# Allegro board PMOD2BNC_V1_0_1.brd
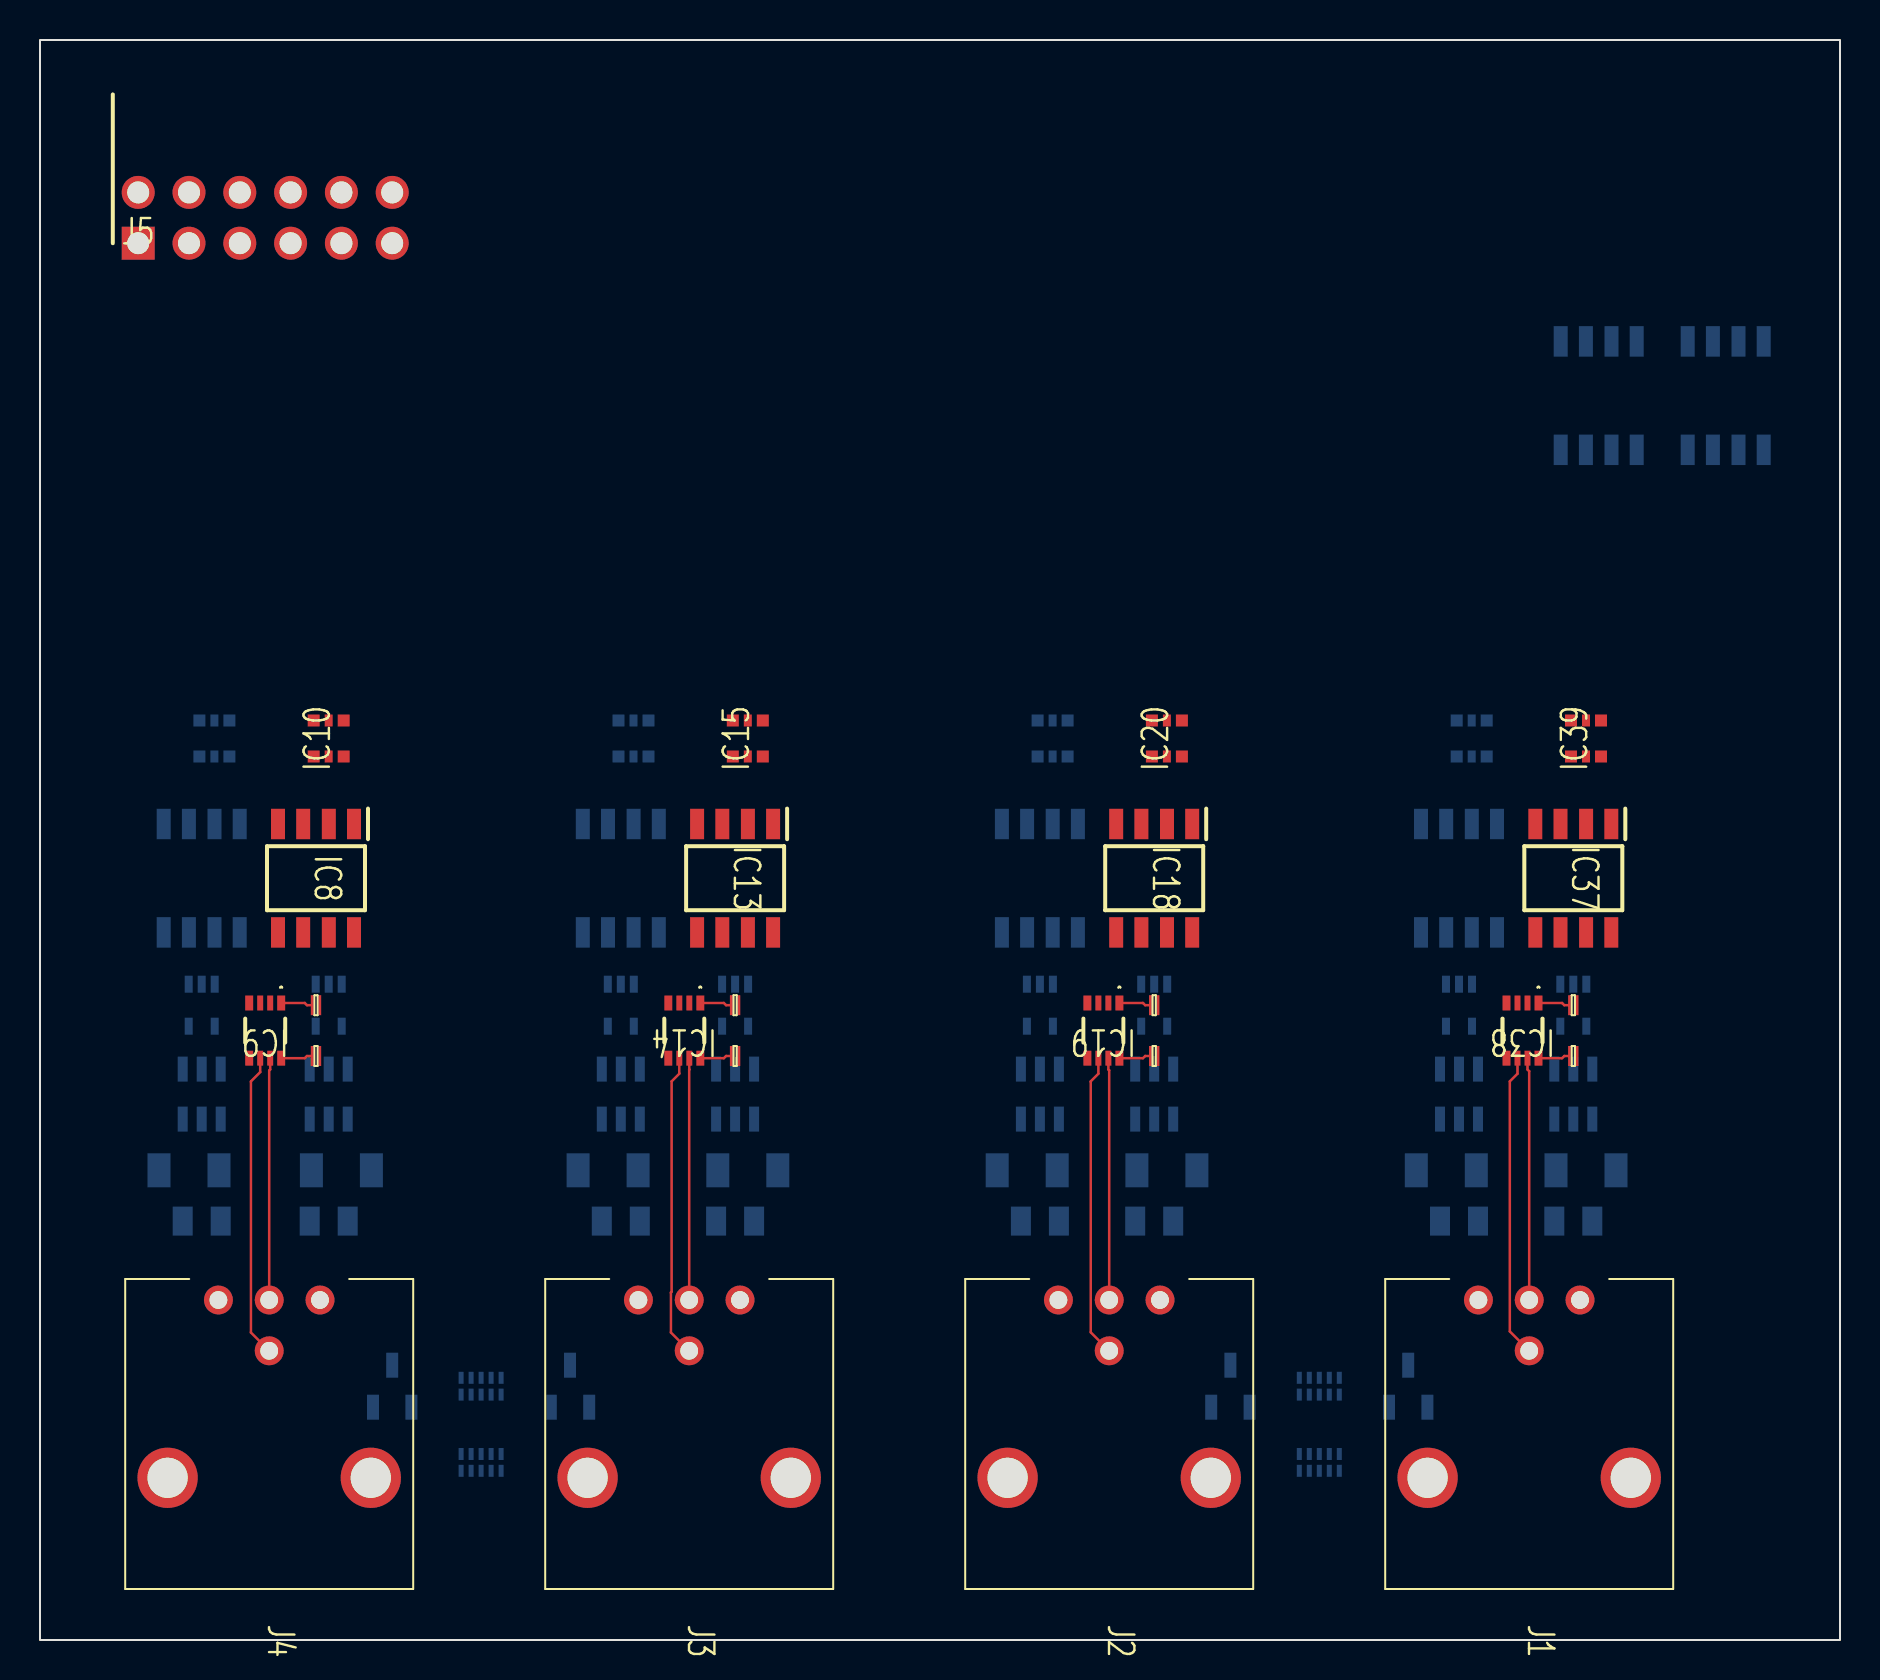
[diagram p0: board, top side]
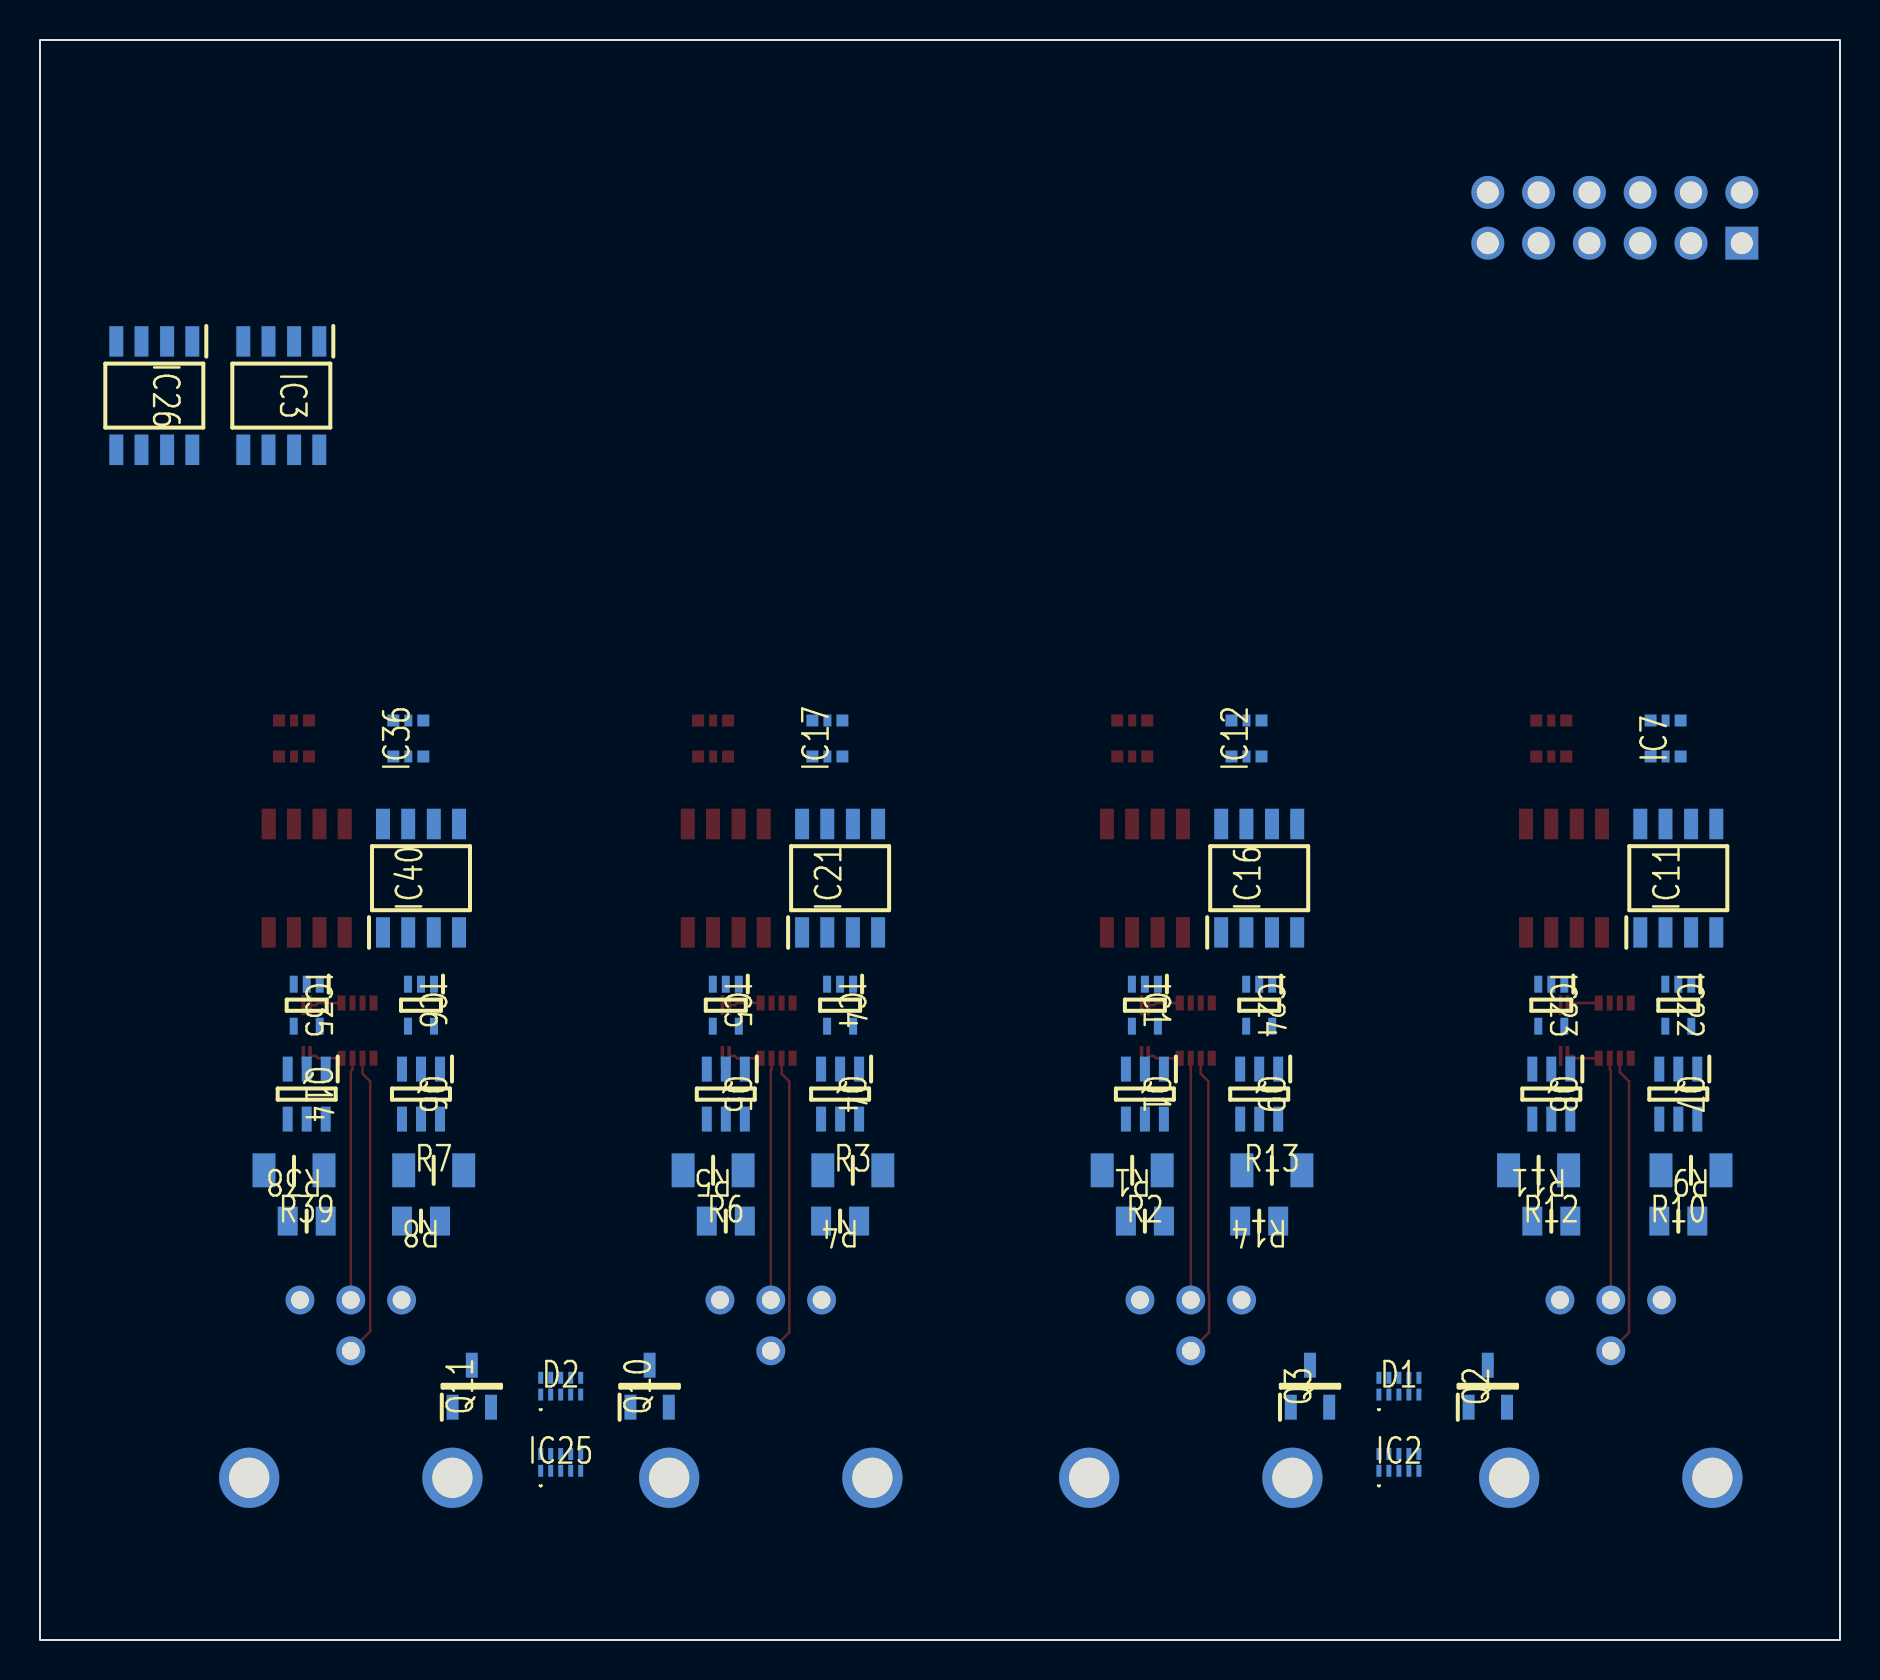
[diagram p1: board, bottom side, seen from below]

Outline 90 x 80 mm; copper layers: TOP, GND, VCC, BOTTOM. Coordinates in mm from the lower left corner of the outline.
Outline path: rectangle 0,0 90,80

## Placement (name value [footprint] x y rotation side)
C1  MAASL063SB7103MFCA01  [100NCAP]  13.8 31.74 180 top
C2  MAASL063SB7103MFCA01  [100NCAP]  13.8 29.2 180 top
C8  MAASL063SB7103MFCA01  [100NCAP]  34.76 31.74 180 top
C9  MAASL063SB7103MFCA01  [100NCAP]  34.76 29.2 180 top
C15  MAASL063SB7103MFCA01  [100NCAP]  55.71 31.74 180 top
C16  MAASL063SB7103MFCA01  [100NCAP]  55.71 29.2 180 top
C36  MAASL063SB7103MFCA01  [100NCAP]  76.66 31.74 180 top
C37  MAASL063SB7103MFCA01  [100NCAP]  76.66 29.2 180 top
D1  PESD4USB3B_TBSX  [PESD4USB3BTBSX]  22.06 12.69 180 bottom
D2  PESD4USB3B_TBSX  [PESD4USB3BTBSX]  63.97 12.69 180 bottom
IC1  NLVHC1G14DFT1G  [SOT65P210X110-5N]  34.76 31.74 270 bottom
IC2  PESD4USB5B_TBRX  [PESD4USB5BTBRX]  22.06 8.88 180 bottom
IC3  FDS8958B  [SOIC127P600X175-8N]  77.94 62.22 270 bottom
IC4  NLVHC1G14DFT1G  [SOT65P210X110-5N]  49.99 31.74 270 bottom
IC5  NLVHC1G14DFT1G  [SOT65P210X110-5N]  55.71 31.74 270 bottom
IC6  NLVHC1G14DFT1G  [SOT65P210X110-5N]  70.95 31.74 270 bottom
IC7  74LVC1G3157GW_125  [74LVC1G3157GW125]  8.72 45.08 90 bottom
IC8  SI8620BC_B_IS  [SOIC127P600X175-8N]  13.8 38.09 270 top
IC9  74LVCH2T45DC_Q100H  [74LVCH2T45DCQ100H]  11.26 30.47 180 top
IC10  74LVC1G3157GW_125  [74LVC1G3157GW125]  14.44 45.08 90 top
IC11  SI8620BC_B_IS  [SOIC127P600X175-8N]  8.08 38.09 90 bottom
IC12  74LVC1G3157GW_125  [74LVC1G3157GW125]  29.67 45.08 90 bottom
IC13  SI8620BC_B_IS  [SOIC127P600X175-8N]  34.76 38.09 270 top
IC14  74LVCH2T45DC_Q100H  [74LVCH2T45DCQ100H]  32.22 30.47 180 top
IC15  74LVC1G3157GW_125  [74LVC1G3157GW125]  35.39 45.08 90 top
IC16  SI8620BC_B_IS  [SOIC127P600X175-8N]  29.04 38.09 90 bottom
IC17  74LVC1G3157GW_125  [74LVC1G3157GW125]  50.63 45.08 90 bottom
IC18  SI8620BC_B_IS  [SOIC127P600X175-8N]  55.71 38.09 270 top
IC19  74LVCH2T45DC_Q100H  [74LVCH2T45DCQ100H]  53.17 30.47 180 top
IC20  74LVC1G3157GW_125  [74LVC1G3157GW125]  56.34 45.08 90 top
IC21  SI8620BC_B_IS  [SOIC127P600X175-8N]  49.99 38.09 90 bottom
IC22  NLVHC1G14DFT1G  [SOT65P210X110-5N]  8.08 31.74 270 bottom
IC23  NLVHC1G14DFT1G  [SOT65P210X110-5N]  14.44 31.74 270 bottom
IC24  NLVHC1G14DFT1G  [SOT65P210X110-5N]  29.04 31.74 270 bottom
IC25  PESD4USB5B_TBRX  [PESD4USB5BTBRX]  63.97 8.88 180 bottom
IC26  FDS8958B  [SOIC127P600X175-8N]  84.28 62.22 270 bottom
IC35  NLVHC1G14DFT1G  [SOT65P210X110-5N]  76.66 31.74 270 bottom
IC36  74LVC1G3157GW_125  [74LVC1G3157GW125]  71.59 45.08 90 bottom
IC37  SI8620BC_B_IS  [SOIC127P600X175-8N]  76.66 38.09 270 top
IC38  74LVCH2T45DC_Q100H  [74LVCH2T45DCQ100H]  74.12 30.47 180 top
IC39  74LVC1G3157GW_125  [74LVC1G3157GW125]  77.3 45.08 90 top
IC40  SI8620BC_B_IS  [SOIC127P600X175-8N]  70.95 38.09 90 bottom
J1  031_6576  [0316576]  77 17 270 top
J2  031_6576  [0316576]  56 17 270 top
J3  031_6576  [0316576]  35 17 270 top
J4  031_6576  [0316576]  14 17 270 top
J5  71764_0114  [717640112]  4.91 69.84 0 top
Q1  NTGD4167CT1G  [SOT95P275X110-6N]  34.76 27.3 270 bottom
Q2  NVR4501NT1G  [SOT96P237X111-3N]  17.61 12.69 90 bottom
Q3  NVR4501NT1G  [SOT96P237X111-3N]  26.5 12.69 90 bottom
Q4  NTGD4167CT1G  [SOT95P275X110-6N]  49.99 27.3 270 bottom
Q5  NTGD4167CT1G  [SOT95P275X110-6N]  55.71 27.3 270 bottom
Q6  NTGD4167CT1G  [SOT95P275X110-6N]  70.95 27.3 270 bottom
Q7  NTGD4167CT1G  [SOT95P275X110-6N]  8.08 27.3 270 bottom
Q8  NTGD4167CT1G  [SOT95P275X110-6N]  14.44 27.3 270 bottom
Q9  NTGD4167CT1G  [SOT95P275X110-6N]  29.04 27.3 270 bottom
Q10  NVR4501NT1G  [SOT96P237X111-3N]  59.52 12.69 90 bottom
Q11  NVR4501NT1G  [SOT96P237X111-3N]  68.41 12.69 90 bottom
Q14  NTGD4167CT1G  [SOT95P275X110-6N]  76.66 27.3 270 bottom
R1  ERA_8AEB1580V  [RESC3216X70N]  35.39 23.48 0 bottom
R2  RP73PF2A73R2BTDF  [RESC2012X65N]  34.76 20.95 180 bottom
R3  ERA_8AEB1580V  [RESC3216X70N]  49.36 23.48 180 bottom
R4  RP73PF2A73R2BTDF  [RESC2012X65N]  49.99 20.95 0 bottom
R5  ERA_8AEB1580V  [RESC3216X70N]  56.34 23.48 0 bottom
R6  RP73PF2A73R2BTDF  [RESC2012X65N]  55.71 20.95 180 bottom
R7  ERA_8AEB1580V  [RESC3216X70N]  70.31 23.48 180 bottom
R8  RP73PF2A73R2BTDF  [RESC2012X65N]  70.95 20.95 0 bottom
R9  ERA_8AEB1580V  [RESC3216X70N]  7.45 23.48 0 bottom
R10  RP73PF2A73R2BTDF  [RESC2012X65N]  8.08 20.95 180 bottom
R11  ERA_8AEB1580V  [RESC3216X70N]  15.07 23.48 0 bottom
R12  RP73PF2A73R2BTDF  [RESC2012X65N]  14.44 20.95 180 bottom
R13  ERA_8AEB1580V  [RESC3216X70N]  28.41 23.48 180 bottom
R14  RP73PF2A73R2BTDF  [RESC2012X65N]  29.04 20.95 0 bottom
R38  ERA_8AEB1580V  [RESC3216X70N]  77.3 23.48 0 bottom
R39  RP73PF2A73R2BTDF  [RESC2012X65N]  76.66 20.95 180 bottom

## Library data of the parts
C1 C2 C8 C9 C15 C16 C36 C37 = 100nCAP
D1 D2 = PESD4USB3B_TBSX
IC1 IC4-IC6 IC22-IC24 IC35 = NLVHC1G14DFT1G
IC2 IC25 = PESD4USB5B_TBRX
IC3 IC26 = FDS8958B
IC7 IC10 IC12 IC15 IC17 IC20 IC36 IC39 = 74LVC1G3157GW_125
IC8 IC11 IC13 IC16 IC18 IC21 IC37 IC40 = SI8620BC_B_IS
IC9 IC14 IC19 IC38 = 74LVCH2T45DC_Q100H
J1-J4 = 031_6576
J5 = 71764_0114
Q1 Q4-Q9 Q14 = NTGD4167CT1G
Q2 Q3 Q10 Q11 = NVR4501NT1G
R1 R3 R5 R7 R9 R11 R13 R38 = ERA_8AEB1580V
R2 R4 R6 R8 R10 R12 R14 R39 = RP73PF2A73R2BTDF

## Footprints (pads in the part's own frame, mm; a bottom-side part is the same pattern mirrored in y, then rotated)
74LVC1G3157GW125
  rect 0.6x0.6 smd: 1(-0.9,0.75) 3(-0.9,-0.75) 4(0.9,-0.75) 6(0.9,0.75)
  rect 0.6x0.4 smd: 2(-0.9,0) 5(0.9,0)
74LVCH2T45DCQ100H
  rect 0.4x0.75 smd: 1(-0.8,-1.38) 4(0.8,-1.38) 5(0.8,1.38) 8(-0.8,1.38)
  rect 0.3x0.75 smd: 2(-0.25,-1.38) 3(0.25,-1.38) 6(0.25,1.38) 7(-0.25,1.38)
100NCAP
  rect 0.18x1 smd: 1(-0.17,0) 2(0.17,0)
0316576
  round 1.446 hole 0.89: 1(0,0) 2(0,-2.54) 3(0,-5.08) 4(2.54,-2.54)
  round 3.015 hole 2.01: MH1(8.89,-7.62) MH2(8.89,2.54)
717640112
  rect 1.65x1.65 hole 1.1: 1(0,0)
  round 1.65 hole 1.1: 2(0,2.54) 3(2.54,0) 4(2.54,2.54) 5(5.08,0) 6(5.08,2.54) 7(7.62,0) 8(7.62,2.54) 9(10.16,0) 10(10.16,2.54) 11(12.7,0) 12(12.7,2.54)
PESD4USB3BTBSX
  rect 0.25x0.6 smd: 1(-1,-0.42) 2(-0.5,-0.42) 3(0,-0.42) 4(0.5,-0.42) 5(1,-0.42) 6(1,0.42) 7(0.5,0.42) 8(0,0.42) 9(-0.5,0.42) 10(-1,0.42)
PESD4USB5BTBRX
  rect 0.25x0.6 smd: 1(-1,-0.42) 2(-0.5,-0.42) 3(0,-0.42) 4(0.5,-0.42) 5(1,-0.42) 6(1,0.42) 7(0.5,0.42) 8(0,0.42) 9(-0.5,0.42) 10(-1,0.42)
RESC2012X65N
  rect 1x1.45 smd: 1(-0.95,0) 2(0.95,0)
RESC3216X70N
  rect 1.15x1.7 smd: 1(-1.5,0) 2(1.5,0)
SOIC127P600X175-8N
  rect 1.525x0.7 smd: 1(-2.71,1.9) 2(-2.71,0.64) 3(-2.71,-0.64) 4(-2.71,-1.9) 5(2.71,-1.9) 6(2.71,-0.64) 7(2.71,0.64) 8(2.71,1.9)
SOT65P210X110-5N
  rect 0.85x0.4 smd: 1(-1.05,0.65) 2(-1.05,0) 3(-1.05,-0.65) 4(1.05,-0.65) 5(1.05,0.65)
SOT95P275X110-6N
  rect 1.25x0.5 smd: 1(-1.25,0.95) 2(-1.25,0) 3(-1.25,-0.95) 4(1.25,-0.95) 5(1.25,0) 6(1.25,0.95)
SOT96P237X111-3N
  rect 1.25x0.6 smd: 1(-1.05,0.96) 2(-1.05,-0.96) 3(1.05,0)

## Nets
3V3_FPGA: IC7.5(VCC) IC8.1(VDD1) IC10.5(VCC) IC11.8(VDD2) IC12.5(VCC) IC13.1(VDD1) IC15.5(VCC) IC16.8(VDD2) IC17.5(VCC) IC18.1(VDD1) IC20.5(VCC) IC21.8(VDD2) IC36.5(VCC) IC37.1(VDD1) IC39.5(VCC) IC40.8(VDD2) J5.3 J5.4
12V0: IC3.3(S2) IC26.3(S2)
GND_FPGA: IC7.2(GND) IC8.4(GND1) IC10.2(GND) IC11.5(GND2) IC12.2(GND) IC13.4(GND1) IC15.2(GND) IC16.5(GND2) IC17.2(GND) IC18.4(GND1) IC20.2(GND) IC21.5(GND2) IC36.2(GND) IC37.4(GND1) IC39.2(GND) IC40.5(GND2) J5.1 J5.2
GND_PWR: C1.1 C2.1 C8.1 C9.1 C15.1 C16.1 C36.1 C37.1 IC1.3(GND) IC3.1(S1) IC4.3(GND) IC5.3(GND) IC6.3(GND) IC8.5(GND2) IC9.4(GND) IC11.4(GND1) IC13.5(GND2) IC14.4(GND) IC16.4(GND1) IC18.5(GND2) IC19.4(GND) IC21.4(GND1) IC22.3(GND) IC23.3(GND) IC24.3(GND) IC26.1(S1) IC35.3(GND) IC37.5(GND2) IC38.4(GND) IC40.4(GND1) J1.1 J1.3 J2.1 J2.3 J3.1 J3.3 J4.1 J4.3 Q1.5(S1) Q2.2(S) Q3.2(S) Q4.5(S1) Q5.5(S1) Q6.5(S1) Q7.5(S1) Q8.5(S1) Q9.5(S1) Q10.2(S) Q11.2(S) Q14.5(S1)
VCC_PWR: C1.2 C2.2 C8.2 C9.2 C15.2 C16.2 C36.2 C37.2 IC1.5(VCC) IC4.5(VCC) IC5.5(VCC) IC6.5(VCC) IC8.8(VDD2) IC9.1(VCC_A_) IC9.8(VCC_B_) IC11.1(VDD1) IC13.8(VDD2) IC14.1(VCC_A_) IC14.8(VCC_B_) IC16.1(VDD1) IC18.8(VDD2) IC19.1(VCC_A_) IC19.8(VCC_B_) IC21.1(VDD1) IC22.5(VCC) IC23.5(VCC) IC24.5(VCC) IC35.5(VCC) IC37.8(VDD2) IC38.1(VCC_A_) IC38.8(VCC_B_) IC40.1(VDD1) Q1.2(S2) Q4.2(S2) Q5.2(S2) Q6.2(S2) Q7.2(S2) Q8.2(S2) Q9.2(S2) Q14.2(S2)
N03864_TRCV2: IC20.3(Y0) IC21.6(B2)
N03864_TRCV3: IC15.3(Y0) IC16.6(B2)
N03864_TRCV4: IC10.3(Y0) IC11.6(B2)
N03884_TRCV2: IC17.3(Y0) IC21.7(B1)
N03884_TRCV3: IC12.3(Y0) IC16.7(B1)
N03884_TRCV4: IC7.3(Y0) IC11.7(B1)
N03944_TRCV2: IC18.7(B1) IC19.2(1A) IC21.2(A1)
N03944_TRCV3: IC13.7(B1) IC14.2(1A) IC16.2(A1)
N03944_TRCV4: IC8.7(B1) IC9.2(1A) IC11.2(A1)
N03988_TRCV2: IC18.6(B2) IC19.3(2A) IC21.3(A2)
N03988_TRCV3: IC13.6(B2) IC14.3(2A) IC16.3(A2)
N03988_TRCV4: IC8.6(B2) IC9.3(2A) IC11.3(A2)
N04114_TR3: IC5.4(Y) Q5.3(G2)
N04114_TR4: IC4.4(Y) Q4.3(G2)
N04114_TR5: IC1.4(Y) Q1.3(G2)
N04114_TR7: IC23.4(Y) Q8.3(G2)
N04114_TR8: IC22.4(Y) Q7.3(G2)
N04142_TR3: Q5.4(D2) R5.2
N04142_TR4: Q4.4(D2) R3.2
N04142_TR5: Q1.4(D2) R1.2
N04142_TR7: Q8.4(D2) R11.2
N04142_TR8: Q7.4(D2) R9.2
N04158_TRCV2: IC18.3(A2) IC20.1(Y1)
N04158_TRCV3: IC13.3(A2) IC15.1(Y1)
N04158_TRCV4: IC8.3(A2) IC10.1(Y1)
N04162_TR3: Q5.6(D1) R6.1
N04162_TR4: Q4.6(D1) R4.1
N04162_TR5: Q1.6(D1) R2.1
N04162_TR7: Q8.6(D1) R12.1
N04162_TR8: Q7.6(D1) R10.1
N04170_TRCV2: IC17.1(Y1) IC18.2(A1)
N04170_TRCV3: IC12.1(Y1) IC13.2(A1)
N04170_TRCV4: IC7.1(Y1) IC8.2(A1)
N00459: D2.3(GND_1) D2.8(GND_2) Q10.3(D)
N00484: IC25.3(GND_1) IC25.8(GND_2) Q11.3(D)
N01414: IC39.3(Y0) IC40.6(B2)
N01460: IC36.3(Y0) IC40.7(B1)
N01560: IC37.7(B1) IC38.2(1A) IC40.2(A1)
N01576: IC37.6(B2) IC38.3(2A) IC40.3(A2)
N02564: IC35.4(Y) Q14.3(G2)
N02595: Q14.4(D2) R38.2
N02615: Q14.6(D1) R39.1
N02871: IC36.4(Z) J5.11
N02889: IC17.4(Z) J5.9
N02913: IC12.4(Z) J5.7
N02946: IC7.4(Z) J5.5
N02974: IC10.4(Z) J5.6
N03044: IC36.6(S) IC39.6(S)
N03056: IC17.6(S) IC20.6(S)
N03071: IC12.6(S) IC15.6(S)
N03083: IC7.6(S) IC10.6(S)
N03095: IC38.5(DIR)
N03107: IC19.5(DIR)
N03119: IC14.5(DIR)
N03131: IC9.5(DIR)
N03320: IC37.3(A2) IC39.1(Y1)
N03332: IC36.1(Y1) IC37.2(A1)
N03351: D2.1(CH1) IC25.1(CH1) IC38.7(1B) J1.2 R38.1 R39.2
N03369: D2.2(CH2) IC25.2(CH2) IC38.6(2B) J1.4 R7.1 R8.2
N03381: D2.4(CH3) IC19.7(1B) IC25.4(CH3) J2.2 R5.1 R6.2
N03410: D2.5(CH4) IC19.6(2B) IC25.5(CH4) J2.4 R3.1 R4.2
N03422: D1.1(CH1) IC2.1(CH1) IC14.7(1B) J3.2 R1.1 R2.2
N03434: D1.2(CH2) IC2.2(CH2) IC14.6(2B) J3.4 R13.1 R14.2
N03446: D1.4(CH3) IC2.4(CH3) IC9.7(1B) J4.2 R11.1 R12.2
N03458: D1.5(CH4) IC2.5(CH4) IC9.6(2B) J4.4 R9.1 R10.2
N03470: IC6.2(A) IC35.2(A) Q6.1(G1) Q14.1(G1)
N03492: IC4.2(A) IC5.2(A) Q4.1(G1) Q5.1(G1)
N03514: IC1.2(A) IC24.2(A) Q1.1(G1) Q9.1(G1)
N03538: IC22.2(A) IC23.2(A) Q7.1(G1) Q8.1(G1)
N03748: IC3.2(G1) IC3.4(G2) IC26.2(G1) IC26.4(G2) Q3.1(G) Q11.1(G)
N04132: IC6.4(Y) Q6.3(G2)
N04160: Q6.4(D2) R7.2
N04180: Q6.6(D1) R8.1
N04349: IC24.4(Y) Q9.3(G2)
N04377: Q9.4(D2) R13.2
N04397: Q9.6(D1) R14.1
N05863: IC26.5(D2_1) IC26.6(D2_2) IC26.7(D1_1) IC26.8(D1_2) Q10.1(G)
N06487: D1.3(GND_1) D1.8(GND_2) Q2.3(D)
N06507: IC2.3(GND_1) IC2.8(GND_2) Q3.3(D)
N06731: IC3.5(D2_1) IC3.6(D2_2) IC3.7(D1_1) IC3.8(D1_2) Q2.1(G)
N12525: IC39.4(Z) J5.12
N12551: IC20.4(Z) J5.10
N12586: IC15.4(Z) J5.8

Pads without a net: D1 6 7 9 10; D2 6 7 9 10; IC1 1; IC2 6 7 9 10; IC4 1; IC5 1; IC6 1; IC22 1; IC23 1; IC24 1; IC25 6 7 9 10; IC35 1; J1 MH1 MH2; J2 MH1 MH2; J3 MH1 MH2; J4 MH1 MH2

## Routing (per net, layer and track width the routed paths; a pad name or vN(x,y) marks a point on that pad's centre or on a via; arc(x,y) is an arc through that point)
VCC_PWR: length 12.9
  TOP w0.127: IC9.1 13.24,31.85 13.35,31.74 C1.2 ; IC38.8 76.1,29.09 76.21,29.2 C37.2 ; IC14.1 34.19,31.85 34.3,31.74 C8.2 ; IC19.8 55.15,29.09 55.26,29.2 C16.2 ; IC9.8 13.24,29.09 13.35,29.2 C2.2 ; C36.2 76.21,31.74 76.1,31.85 IC38.1 ; IC14.8 34.19,29.09 34.3,29.2 C9.2 ; C15.2 55.26,31.74 55.15,31.85 IC19.1
N03351: length 12.1
  TOP w0.127: IC38.7 74.38,28.52 74.46,28.44 J1.2
N03369: length 15.2
  TOP w0.127: IC38.6 73.88,28.31 73.49,27.93 73.49,15.43 J1.4
N03381: length 12.1
  TOP w0.127: J2.2 53.46,28.48 53.42,28.52 IC19.7
N03410: length 15.2
  TOP w0.127: J2.4 52.53,15.39 52.53,27.93 52.92,28.31 IC19.6
N03422: length 12.1
  TOP w0.127: J3.2 32.46,28.52 32.47,28.52 IC14.7
N03434: length 15.2
  TOP w0.127: IC14.6 31.97,28.31 31.58,27.93 31.58,17.41 31.55,17.38 31.55,15.37 J3.4
N03446: length 12.1
  TOP w0.127: IC9.7 11.51,28.52 11.46,28.47 J4.2
N03458: length 15.2
  TOP w0.127: J4.4 10.55,15.37 10.55,27.93 11.01,28.39 IC9.6
